# EAGLE board PCB_BOARD (EAGLE 9.7.0)
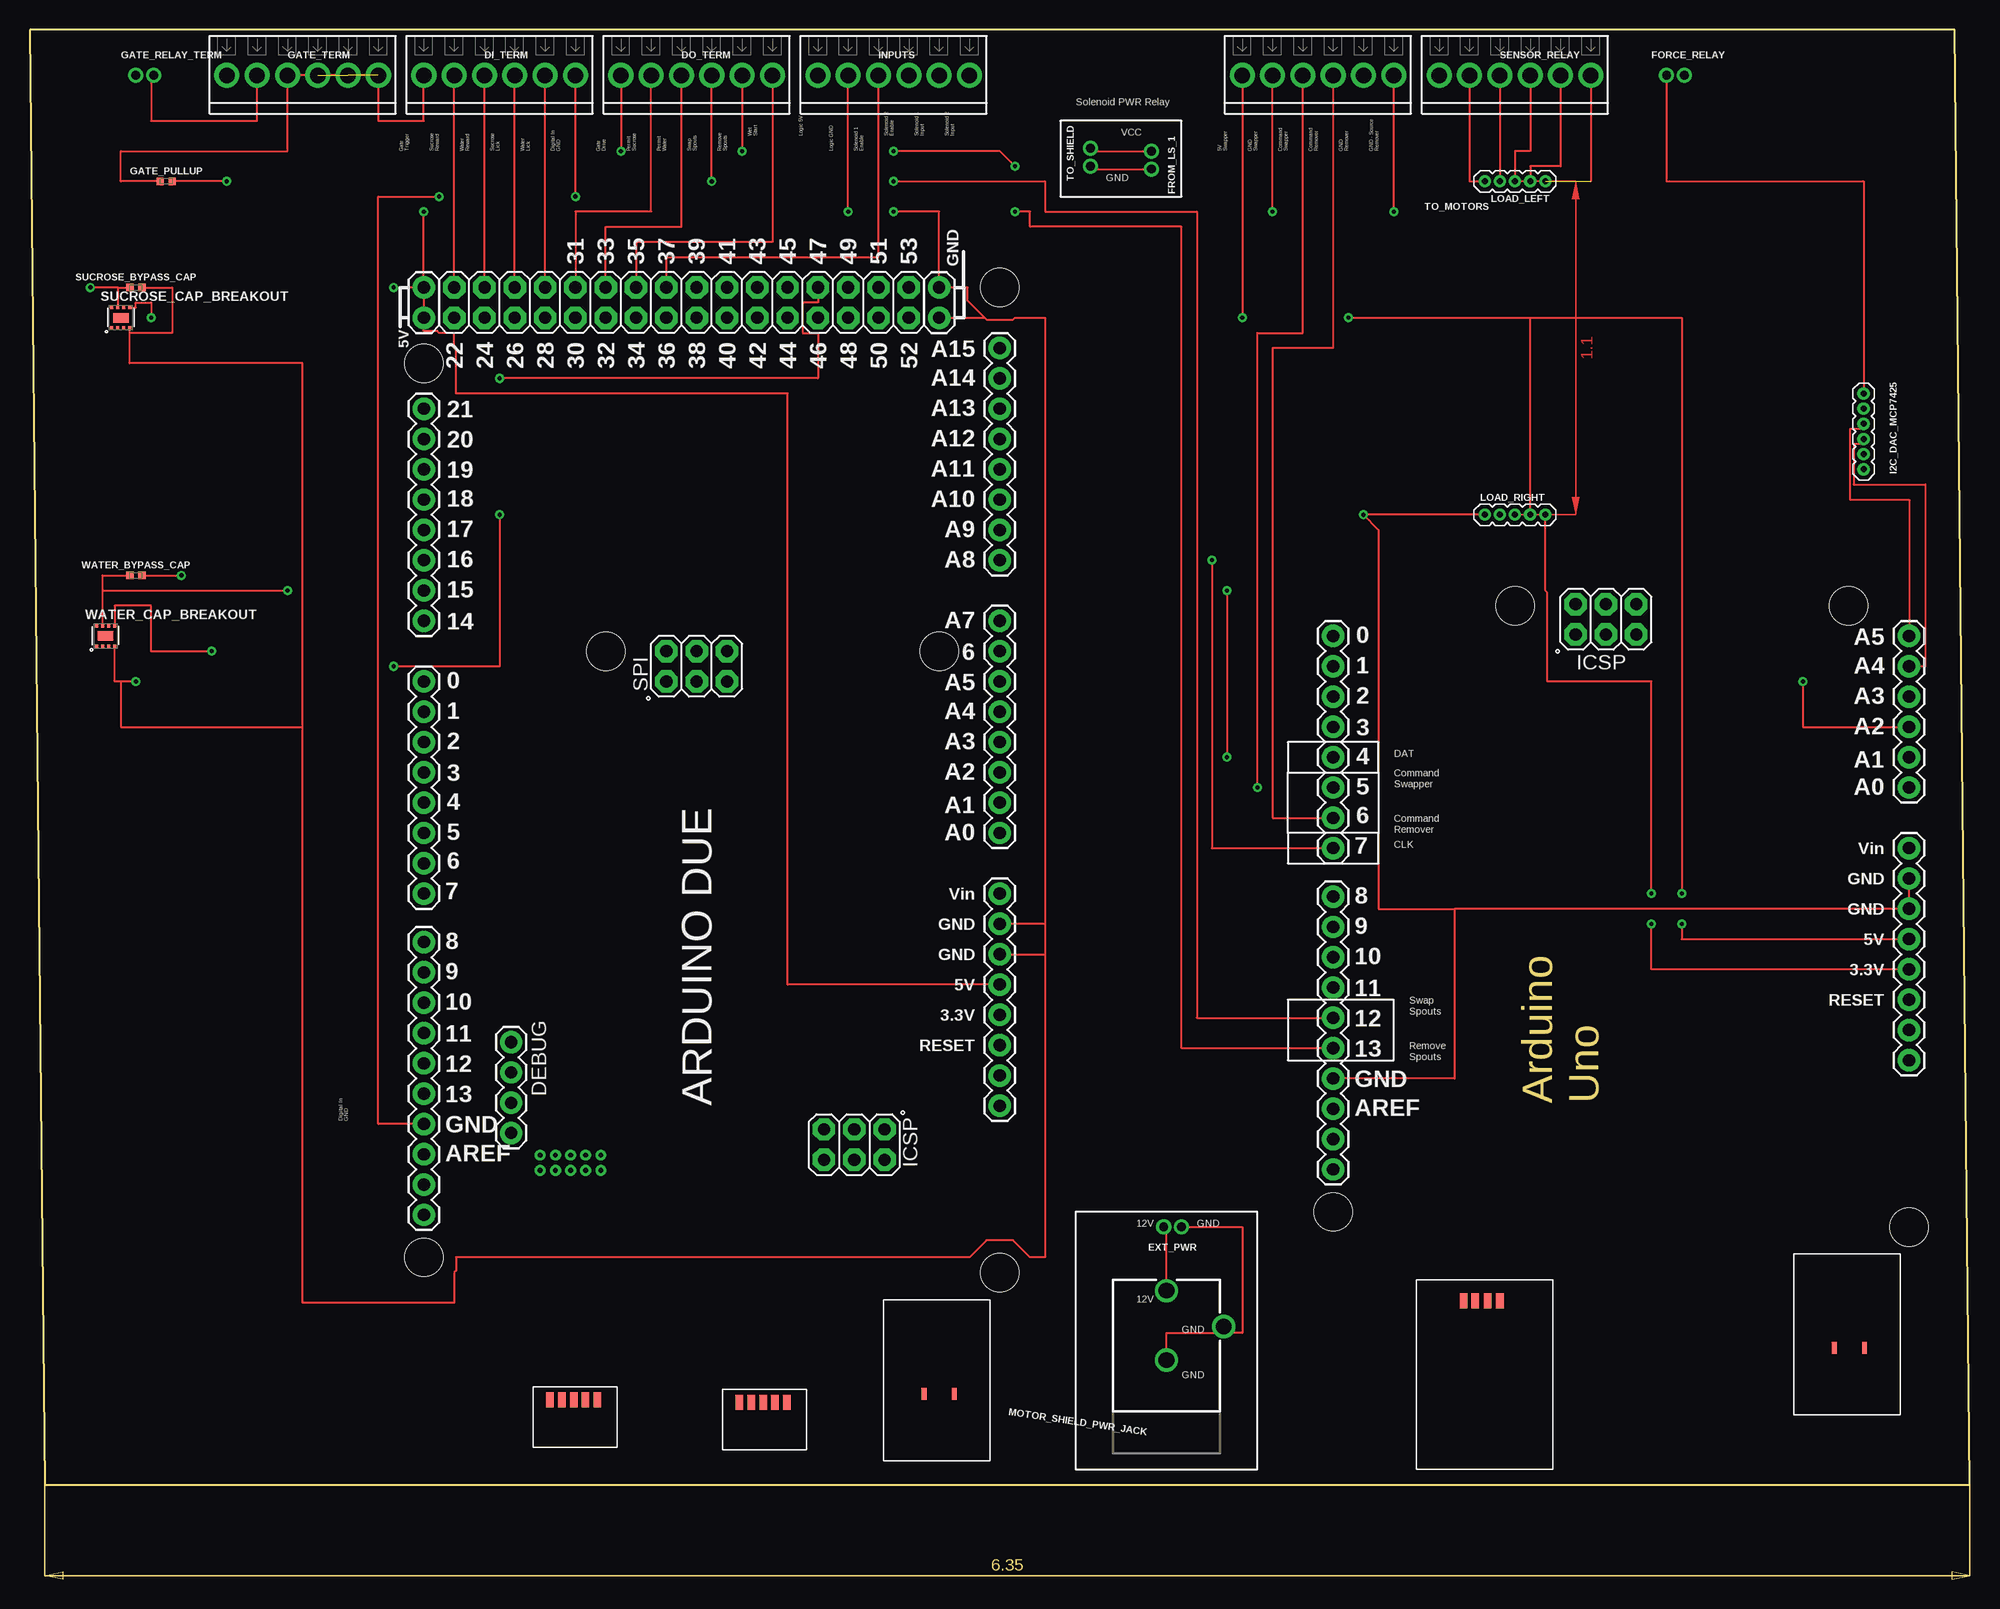
[diagram p0: board, top side]
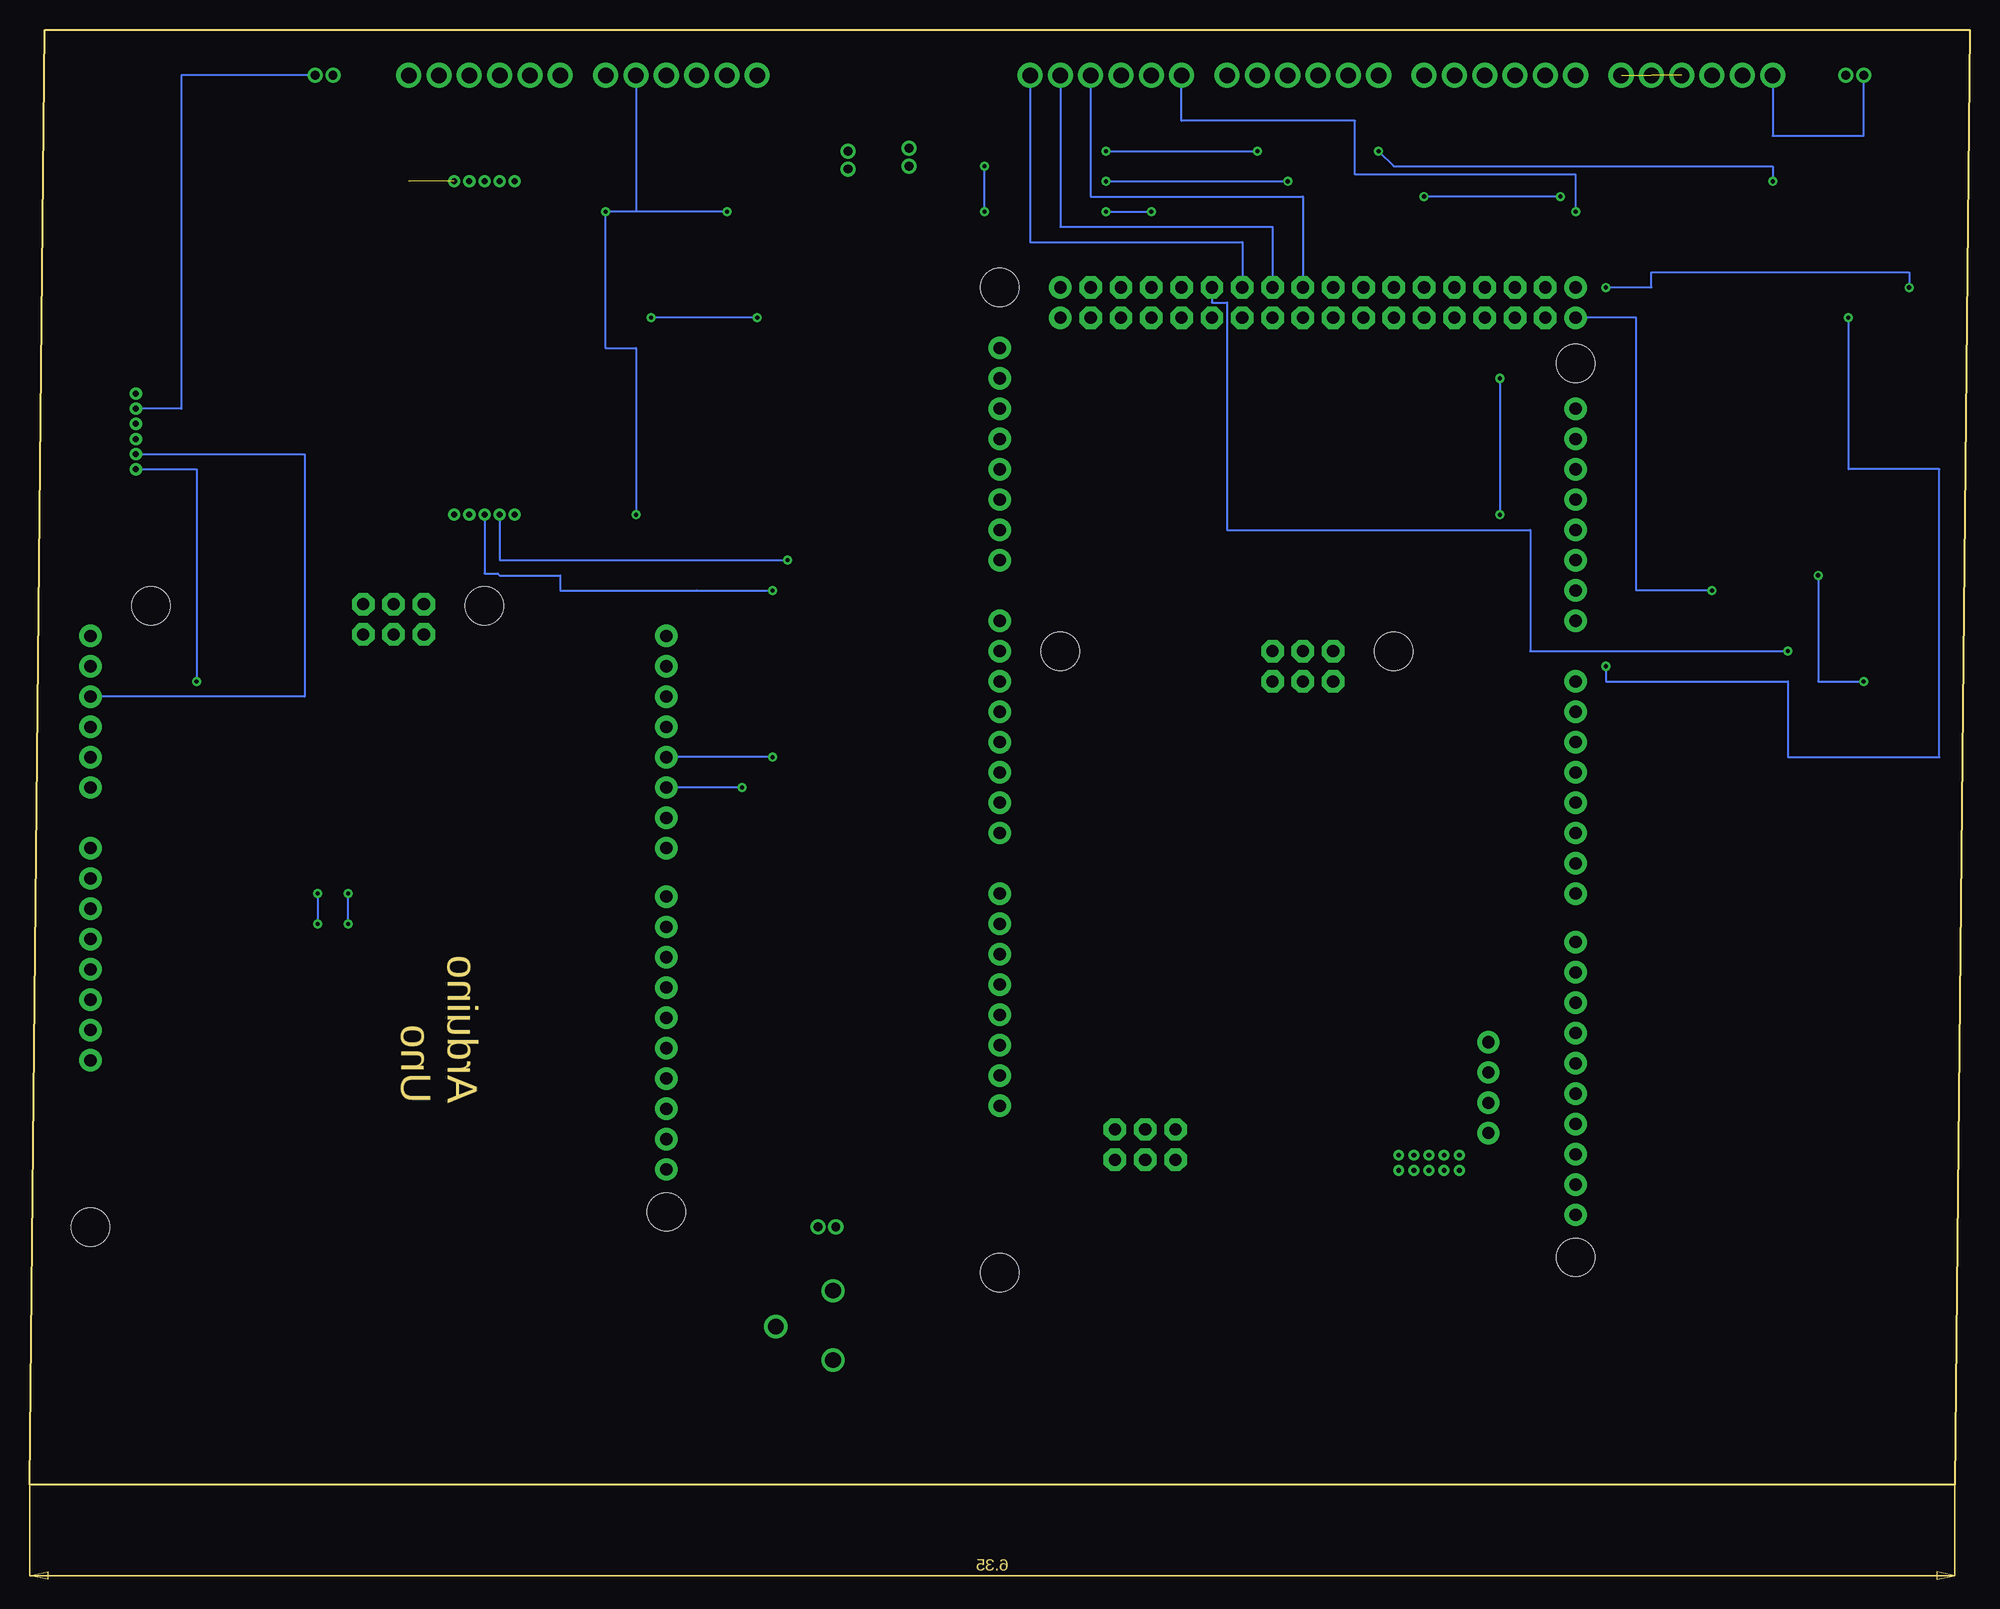
[diagram p1: board, bottom side, seen from below]

Size 162.56 x 121.92 mm. Coordinates in mm from the lower left corner, seen from the top.
Outline: 161.29,121.92 0,121.92 1.27,0 162.56,0 161.29,121.92
Copper layers (1*16): Top / Bottom
Stack-up Default Layer Stack: Top User Defined 0.035mm / Dielectric-1 User Defined 1.5mm / Bottom User Defined 0.035mm
Design rules "default": minimum track width 6mil, minimum drill 0.35mm, track to track 6mil, track to pad 6mil, pad to pad 6mil, via to via 6mil, smd to smd 6mil, copper to edge 40mil, drill to drill 6mil, minimum pad ring 10mil, minimum via ring 8mil, stop-mask expansion 4mil, vias tented up to drill 0mil, thermal gap 10mil

## Footprints (pad centres in the part's own frame; a part is rotated, then mirrored left to right if it is on the bottom)
1X06_2.54MM_SCREWPIN = drill 1.3 pad 2.1: 1 -6.35,0; 2 -3.81,0; 3 -1.27,0; 4 1.27,0; 5 3.81,0; 6 6.35,0
1X02_1.5MM_NO_SILK = drill 0.75 pad 1.25: 1 1.5,0; 2 0,0
0402-TIGHT = smd 0.6 x 0.6: 1 -0.5,0; 2 0.5,0
1X06_1.27MM = drill 0.508 pad 1: 1 0,0; 2 1.27,0; 3 2.54,0; 4 3.81,0; 5 5.08,0; 6 6.35,0
1X05_1.27MM = drill 0.508 pad 1: 1 0,0; 2 1.27,0; 3 2.54,0; 4 3.81,0; 5 5.08,0
POWER_JACK_PTH_BREAD = drill 1.3: GND 0,7.9; GNDBREAK 4.8,10.7; PWR 0,13.7
ARDUINO_UNO = drill 1.016 pad 1.88: 0 63.5,50.8; 1 60.96,50.8; 2 58.42,50.8; 3 55.88,50.8; 3.3V 35.56,2.54; 4 53.34,50.8; 5 50.8,50.8; 5V 38.1,2.54; 6 48.26,50.8; 7 45.72,50.8; 8 41.656,50.8; 9 39.116,50.8; 10 36.576,50.8; 11 34.036,50.8; 12 31.496,50.8; 13 28.956,50.8; A0 50.8,2.54; A1 53.34,2.54; A2 55.88,2.54; A3 58.42,2.54; A4 60.96,2.54; A5 63.5,2.54; AREF 23.876,50.8; GND 26.416,50.8; GND. 43.18,2.54; GND.. 40.64,2.54; I/OREF 30.48,2.54; N/C 27.94,2.54; RESET 33.02,2.54; SCL 18.796,50.8; SDA 21.336,50.8; VIN 45.72,2.54 | drill 1.016 pad 1.88 octagon: +5V 66.167,30.48; GND_ 66.167,25.4; MISO 63.627,30.48; MOSI 66.167,27.94; RESET. 63.627,25.4; SCK 63.627,27.94 | smd 1.016 x 0.508: <PWR>+V 3.861,8.814; <PWR>-V 3.861,6.274 | smd 1.27 x 0.635: <USB>+V 7.772,39.878; <USB>D+ 7.772,38.887; <USB>D- 7.772,37.871; <USB>GND 7.772,36.83 | hole 3.2: 66.04,7.62; 66.04,35.56; 15.24,50.8; 13.97,2.54
ARDUINO_DUE = drill 1.016 pad 1.88: 0 63.5,50.8; 1 60.96,50.8; 2 58.42,50.8; 3 55.88,50.8; 3.3V 35.56,2.54; 4 53.34,50.8; 5 50.8,50.8; 5V 38.1,2.54; 5V. 93.98,50.8; 5V.. 96.52,50.8; 6 48.26,50.8; 7 45.72,50.8; 8 41.656,50.8; 9 39.116,50.8; 10 36.576,50.8; 11 34.036,50.8; 12 31.496,50.8; 13 28.956,50.8; 14 68.58,50.8; 15 71.12,50.8; 16 73.66,50.8; 17 76.2,50.8; 18 78.74,50.8; 19 81.28,50.8; 20 83.82,50.8; 21 86.36,50.8; A0 50.8,2.54; A1 53.34,2.54; A2 55.88,2.54; A3 58.42,2.54; A4 60.96,2.54; A5 63.5,2.54; A6 66.04,2.54; A7 68.58,2.54; A8 73.66,2.54; A9 76.2,2.54; A10 78.74,2.54; A11 81.28,2.54; A12 83.82,2.54; A13 86.36,2.54; A14 88.9,2.54; A15 91.44,2.54; AREF 23.876,50.8; GND 26.416,50.8; GND1 33.274,43.485; GND. 43.18,2.54; GND.. 40.64,2.54; GND... 93.98,7.62; GND.... 96.52,7.62; I/OREF 30.48,2.54; N/C 27.94,2.54; RESET 33.02,2.54; RESET.. 25.654,43.485; SCL1 18.796,50.8; SDA1 21.336,50.8; SWCLK 30.734,43.485; SWDIO 28.194,43.485; VIN 45.72,2.54 | drill 1.016 pad 1.88 octagon: 22 93.98,48.26; 23 96.52,48.26; 24 93.98,45.72; 25 96.52,45.72; 26 93.98,43.18; 27 96.52,43.18; 28 93.98,40.64; 29 96.52,40.64; 30 93.98,38.1; 31 96.52,38.1; 32 93.98,35.56; 33 96.52,35.56; 34 93.98,33.02; 35 96.52,33.02; 36 93.98,30.48; 37 96.52,30.48; 38 93.98,27.94; 39 96.52,27.94; 40 93.98,25.4; 41 96.52,25.4; 42 93.98,22.86; 43 96.52,22.86; 44 93.98,20.32; 45 96.52,20.32; 46 93.98,17.78; 47 96.52,17.78; 48 93.98,15.24; 49 96.52,15.24; 50 93.98,12.7; 51 96.52,12.7; 52 93.98,10.16; 53 96.52,10.16; +5V 25.959,17.272; +5V_ 66.04,30.48; GND_ 25.959,12.192; GND__ 66.04,25.4; MISO 63.5,30.48; MISO2 23.419,17.272; MOSI 66.04,27.94; MOSI2 25.959,14.732; RESET2 23.419,12.192; RESET. 63.5,25.4; SCK 63.5,27.94; SCK2 23.419,14.732 | drill 0.406 pad 0.61: +3.3V 23.8,35.966; GND1. 23.8,37.236; GND1.. 23.8,38.506; GND1... 23.8,41.046; N/C. 23.8,39.776; RESET_ 22.53,41.046; TCK 22.53,37.236; TDI 22.53,39.776; TDO 22.53,38.506; TMS 22.53,35.966 | smd 1.016 x 0.508: <PWR>+V 3.81,8.89; <PWR>-V 3.81,6.35 | smd 1.27 x 0.635: <USB1>+V 3.099,24.359; <USB1>D+ 3.099,23.368; <USB1>D- 3.099,22.352; <USB1>GND 3.099,20.371; <USB1>ID 3.099,21.387; <USB2>+V1 3.302,40.234; <USB2>D+1 3.302,39.243; <USB2>D-1 3.302,38.227; <USB2>GND1 3.302,36.246; <USB2>ID 3.302,37.262 | hole 3.2: 15.24,50.8; 13.97,2.54; 66.04,35.56; 66.04,7.62; 90.17,50.8; 96.52,2.54
UDFN/USON_8_PAD = smd 0.25 x 0.3: 1 -0.75,-0.852; 2 -0.25,-0.852; 3 0.25,-0.852; 4 0.75,-0.852; 5 0.75,0.852; 6 0.25,0.852; 7 -0.25,0.852; 8 -0.75,0.852 | smd 1.3 x 0.8: P$1 0,0

## Placement (x,y rotation side)
DI_TERM  0  [1X06_2.54MM_SCREWPIN]  39.37,118.11 0 top
DO_TERM  1  [1X06_2.54MM_SCREWPIN]  55.88,118.11 0 top
EXT_PWR  2  [1X02_1.5MM_NO_SILK]  96.52,21.59 180 top
FORCE_RELAY  3  [1X02_1.5MM_NO_SILK]  137.16,118.11 0 top
FROM_LS_1  [1X02_1.5MM_NO_SILK]  93.98,111.76 270 top
GATE_PULLUP  3.3KOHM-0402T-1/16W-1%  [0402-TIGHT]  11.43,109.22 0 top
GATE_RELAY_TERM  4  [1X02_1.5MM_NO_SILK]  8.89,118.11 0 top
GATE_TERM  5  [1X06_2.54MM_SCREWPIN]  22.86,118.11 0 top
I2C_DAC_MCP7425  5  [1X06_1.27MM]  153.67,85.09 90 top
INPUTS  6  [1X06_2.54MM_SCREWPIN]  72.39,118.11 0 top
LOAD_LEFT  7  [1X05_1.27MM]  127,109.22 180 top
LOAD_RIGHT  8  [1X05_1.27MM]  121.92,81.28 0 top
MOTOR_SHIELD_PWR_JACK  POWER_JACKPTH_BREAD  [POWER_JACK_PTH_BREAD]  95.25,2.54 0 top
MOTORS_UNO  ARDUINO_UNO  [ARDUINO_UNO]  160.02,7.62 90 top
REWARDS_DUE  ARDUINO_DUE  [ARDUINO_DUE]  83.82,3.81 90 top
SENSOR_RELAY  9  [1X06_2.54MM_SCREWPIN]  124.46,118.11 0 top
SUCROSE_BYPASS_CAP  0.1uF  [0402-TIGHT]  8.89,100.33 0 top
SUCROSE_CAP_BREAKOUT  AT42QT1011-MAHR  [UDFN/USON_8_PAD]  7.62,97.79 0 top
TO_MOTORS  10  [1X06_2.54MM_SCREWPIN]  107.95,118.11 0 top
TO_SHIELD  [1X02_1.5MM_NO_SILK]  88.9,110.49 90 top
WATER_BYPASS_CAP  0.1uF  [0402-TIGHT]  8.89,76.2 0 top
WATER_CAP_BREAKOUT  AT42QT1011-MAHR  [UDFN/USON_8_PAD]  6.35,71.12 0 top

## Library data of the parts
DI_TERM DO_TERM GATE_TERM INPUTS SENSOR_RELAY TO_MOTORS = SparkFun-Connectors; PROD_ID: CONN-14885
EXT_PWR FORCE_RELAY FROM_LS_1 GATE_RELAY_TERM I2C_DAC_MCP7425 LOAD_LEFT LOAD_RIGHT TO_SHIELD = SparkFun-Connectors
GATE_PULLUP = SparkFun-Resistors; PROD_ID: RES-15923
MOTOR_SHIELD_PWR_JACK = SparkFun-Connectors; PROD_ID: COMP-13253
MOTORS_UNO = UNO_NO_DIM
REWARDS_DUE = DUE_NO_DIM
SUCROSE_BYPASS_CAP WATER_BYPASS_CAP = SparkFun-RF; PROD_ID: CAP-15083
SUCROSE_CAP_BREAKOUT WATER_CAP_BREAKOUT = SparkFun-Sensors; PROD_ID: IC-13838

## Nets
3.3V_UNO_RAIL: LOAD_RIGHT.5 MOTORS_UNO.3.3V
5V_DUE_RAIL: INPUTS.1 REWARDS_DUE.5V REWARDS_DUE.5V. REWARDS_DUE.5V.. SUCROSE_BYPASS_CAP.1 SUCROSE_CAP_BREAKOUT.7 WATER_BYPASS_CAP.1 WATER_CAP_BREAKOUT.7
5V_UNO_RAIL: LOAD_RIGHT.4 MOTORS_UNO.5V TO_MOTORS.1
BLK: LOAD_LEFT.2 SENSOR_RELAY.5
CLK: LOAD_RIGHT.2 MOTORS_UNO.7
COM_REMOVE_SPOUT: MOTORS_UNO.6 TO_MOTORS.4
COM_SWAP_SPOUT: MOTORS_UNO.5 TO_MOTORS.3
DAC_FORCE_OUT: FORCE_RELAY.2 I2C_DAC_MCP7425.6
DAC_GND: I2C_DAC_MCP7425.1 MOTORS_UNO.A2
DAC_GND_OUT: FORCE_RELAY.1 I2C_DAC_MCP7425.5
DAC_VCC: I2C_DAC_MCP7425.2 MOTORS_UNO.A3
DAQ-5V-SENSOR: GATE_RELAY_TERM.2 GATE_TERM.1
DAQ-GND-SENSOR: GATE_RELAY_TERM.1 GATE_TERM.2
DAT: LOAD_RIGHT.3 MOTORS_UNO.4
DIGIT_IN_GND: DI_TERM.6 REWARDS_DUE.GND
GATE_DRIVE: DO_TERM.1 GATE_PULLUP.2
GATE_TRIGGER: DI_TERM.1 GATE_PULLUP.1 GATE_TERM.3 GATE_TERM.4 GATE_TERM.5 GATE_TERM.6
GND_DUE_RAIL: INPUTS.2 REWARDS_DUE.GND. REWARDS_DUE.GND.. REWARDS_DUE.GND... REWARDS_DUE.GND.... SUCROSE_BYPASS_CAP.2 SUCROSE_CAP_BREAKOUT.4 WATER_BYPASS_CAP.2 WATER_CAP_BREAKOUT.4
GND_UNO_RAIL: LOAD_RIGHT.1 MOTORS_UNO.GND MOTORS_UNO.GND. MOTORS_UNO.GND.. TO_MOTORS.2 TO_MOTORS.5 TO_MOTORS.6
GRN: LOAD_LEFT.4 SENSOR_RELAY.3
LS_GND_1: FROM_LS_1.2 TO_SHIELD.1
LS_PWR_1: FROM_LS_1.1 TO_SHIELD.2
MS_GND: EXT_PWR.2 MOTOR_SHIELD_PWR_JACK.GND MOTOR_SHIELD_PWR_JACK.GNDBREAK
MS_PWR: EXT_PWR.1 MOTOR_SHIELD_PWR_JACK.PWR
N$3: MOTORS_UNO.A3
PERMIT_SUCROSE: DO_TERM.2 REWARDS_DUE.31
PERMIT_WATER: DO_TERM.3 REWARDS_DUE.33
RED: LOAD_LEFT.1 SENSOR_RELAY.6
REMOVE_SPOUTS: DO_TERM.5 MOTORS_UNO.13
SCL: I2C_DAC_MCP7425.4 MOTORS_UNO.A5
SDA: I2C_DAC_MCP7425.3 MOTORS_UNO.A4
SOLE_1_EN: INPUTS.3 REWARDS_DUE.37
SOLE_1_IN: INPUTS.5 REWARDS_DUE.41
SOLE_2_EN: INPUTS.4 REWARDS_DUE.39
SOLE_2_IN: INPUTS.6 REWARDS_DUE.43
SUCROSE_CAP_SIGNAL: REWARDS_DUE.47 SUCROSE_CAP_BREAKOUT.5
SUCROSE_LICK: DI_TERM.4 REWARDS_DUE.27
SUCROSE_REWARD: DI_TERM.2 REWARDS_DUE.23
SWAP_SPOUTS: DO_TERM.4 MOTORS_UNO.12
WATER_CAP_SIGNAL: REWARDS_DUE.45 WATER_CAP_BREAKOUT.5
WATER_LICK: DI_TERM.5 REWARDS_DUE.29
WATER_REWARD: DI_TERM.3 REWARDS_DUE.25
WET_START: DO_TERM.6 REWARDS_DUE.35
WHT: LOAD_LEFT.3 SENSOR_RELAY.4
YLW: LOAD_LEFT.5 SENSOR_RELAY.2

## Tracks (layer width: path | path; a pad name or v marks a point on that pad's centre or on a via)
3.3V_UNO_RAIL  (via drill 0.35)
  Top 0.152: MOTORS_UNO.3.3V 135.89,43.18 v135.89,46.99 | v135.89,49.53 135.89,67.31 127.15,67.31 127.15,74.78 127,74.93 LOAD_RIGHT.5
  Bottom 0.152: v135.89,46.99 v135.89,49.53
5V_DUE_RAIL  (via drill 0.35)
  Top 0.152: REWARDS_DUE.5V.. REWARDS_DUE.5V. 33.02,96.67 34.14,96.67 34.29,96.52 35.56,96.52 35.56,95.25 35.71,95.09 35.71,91.44 63.5,91.44 63.5,41.91 REWARDS_DUE.5V | REWARDS_DUE.5V.. v33.02,106.68 | 7.37,100.33 SUCROSE_CAP_BREAKOUT.7 | 7.37,100.33 SUCROSE_BYPASS_CAP.1 | REWARDS_DUE.5V.. v30.48,100.33 | 7.37,100.33 v5.08,100.33 | WATER_CAP_BREAKOUT.7 6.1,74.93 | 6.1,74.93 6.1,76.2 WATER_BYPASS_CAP.1 | 6.1,74.93 v21.59,74.93
  Bottom 0.152: INPUTS.1 66.04,114.3 51.51,114.3 51.51,109.78 33.02,109.78 v33.02,106.68 | v30.48,100.33 26.67,100.33 26.67,101.6 5.08,101.6 v5.08,100.33 | v21.59,74.93 27.94,74.93 27.94,97.79 REWARDS_DUE.5V.
5V_UNO_RAIL  (via drill 0.35)
  Top 0.152: TO_MOTORS.1 v101.6,97.79 | v110.49,97.79 125.73,97.79 | 125.73,97.79 138.43,97.79 v138.43,49.53 | v138.43,46.99 138.43,45.72 MOTORS_UNO.5V | LOAD_RIGHT.4 125.73,97.79
  Bottom 0.152: v101.6,97.79 v110.49,97.79 | v138.43,49.53 v138.43,46.99
BLK
  Top 0.152: SENSOR_RELAY.5 128.27,110.49 125.73,110.49 LOAD_LEFT.2
CLK  (via drill 0.35)
  Top 0.152: v99.06,77.47 99.06,53.34 MOTORS_UNO.7
  Bottom 0.152: LOAD_RIGHT.2 123.19,77.47 106.68,77.47 v99.06,77.47
COM_REMOVE_SPOUT
  Top 0.152: MOTORS_UNO.6 104.14,55.88 104.14,95.25 109.22,95.25 TO_MOTORS.4
COM_SWAP_SPOUT  (via drill 0.35)
  Top 0.152: TO_MOTORS.3 106.68,96.52 102.87,96.52 v102.87,58.42
  Bottom 0.152: v102.87,58.42 MOTORS_UNO.5
DAC_FORCE_OUT
  Top 0.152: FORCE_RELAY.2 137.16,109.22 153.67,109.22 I2C_DAC_MCP7425.6
DAC_GND  (via drill 0.35)
  Top 0.152: v148.59,67.31 148.59,63.5 MOTORS_UNO.A2
  Bottom 0.152: I2C_DAC_MCP7425.1 148.59,85.09 v148.59,67.31
DAC_GND_OUT
  Bottom 0.152: FORCE_RELAY.1 149.86,118.11 149.86,90.17 I2C_DAC_MCP7425.5
DAC_VCC
  Bottom 0.152: I2C_DAC_MCP7425.2 139.55,86.36 139.55,66.04 MOTORS_UNO.A3
DAQ-5V-SENSOR
  Bottom 0.152: GATE_TERM.1 16.51,113.03 8.89,113.03 GATE_RELAY_TERM.2
DAQ-GND-SENSOR
  Top 0.152: GATE_TERM.2 19.05,114.3 10.16,114.3 10.16,118.11 GATE_RELAY_TERM.1
DAT  (via drill 0.35)
  Top 0.152: v100.33,74.93 v100.33,60.96
  Bottom 0.152: v100.33,74.93 106.68,74.93 118.11,74.93 118.11,76.2 123.19,76.2 123.34,76.35 124.46,76.35 LOAD_RIGHT.3 | v100.33,60.96 MOTORS_UNO.4
DIGIT_IN_GND  (via drill 0.35)
  Top 0.152: REWARDS_DUE.GND 29.21,30.23 29.21,107.95 v34.29,107.95 | v45.72,107.95 DI_TERM.6
  Bottom 0.152: v34.29,107.95 v45.72,107.95
GATE_DRIVE  (via drill 0.35)
  Top 0.152: DO_TERM.1 v49.53,111.76 | v16.51,109.22 GATE_PULLUP.2
  Bottom 0.152: v49.53,111.76 48.26,110.49 16.51,110.49 v16.51,109.22
GATE_TRIGGER  (2 unrouted)
  Top 0.152: GATE_PULLUP.1 7.62,109.22 7.62,111.76 21.59,111.76 GATE_TERM.3 GATE_TERM.6 29.21,114.3 33.02,114.3 DI_TERM.1
GND_DUE_RAIL  (via drill 0.35)
  Top 0.152: 85.09,46.99 REWARDS_DUE.GND. | REWARDS_DUE.GND.. 85.09,44.45 | 85.09,46.99 85.09,44.45 | 80.01,97.79 78.59,99.22 78.59,100.33 REWARDS_DUE.GND.... 76.2,106.68 v72.39,106.68 | 85.09,46.99 85.09,97.79 82.55,97.79 82.39,97.64 80.17,97.64 80.01,97.79 | REWARDS_DUE.GND... 80.01,97.79 | v68.58,106.68 INPUTS.2 | SUCROSE_BYPASS_CAP.2 11.93,100.33 11.93,96.52 8.37,96.52 SUCROSE_CAP_BREAKOUT.4 8.37,93.98 22.86,93.98 22.86,63.5 | 85.09,44.45 85.09,19.05 83.82,19.05 82.39,20.47 80.17,20.47 78.74,19.05 35.71,19.05 35.71,17.94 35.56,17.78 35.56,15.24 22.86,15.24 22.86,63.5 | WATER_BYPASS_CAP.2 v12.7,76.2 | v8.89,67.31 7.62,67.31 | 7.62,67.31 7.1,67.31 WATER_CAP_BREAKOUT.4 | 7.62,67.31 7.62,63.5 22.86,63.5
  Bottom 0.152: v72.39,106.68 v68.58,106.68 | v12.7,76.2 12.7,67.31 v8.89,67.31
GND_UNO_RAIL  (via drill 0.35)
  Top 0.152: 119.38,48.26 119.38,34.04 MOTORS_UNO.GND | v104.14,106.68 TO_MOTORS.2 | v114.3,106.68 TO_MOTORS.6 | MOTORS_UNO.GND. MOTORS_UNO.GND.. 119.38,48.26 | 119.38,48.26 113.03,48.26 113.03,80.01 v111.76,81.28 LOAD_RIGHT.1
  Bottom 0.152: v104.14,106.68 111.76,106.68 | 111.76,106.68 v114.3,106.68 114.3,95.25 111.76,95.25 v111.76,81.28 | TO_MOTORS.5 111.76,106.68
GRN
  Top 0.152: SENSOR_RELAY.3 LOAD_LEFT.4
LS_GND_1
  Top 0.152: FROM_LS_1.2 88.9,111.76 TO_SHIELD.1
LS_PWR_1
  Top 0.152: FROM_LS_1.1 88.9,110.26 TO_SHIELD.2
MS_GND
  Top 0.152: EXT_PWR.2 101.6,21.59 101.6,12.7 100.05,12.7 | 100.05,12.7 MOTOR_SHIELD_PWR_JACK.GNDBREAK | MOTOR_SHIELD_PWR_JACK.GND 95.25,12.7 100.05,12.7
MS_PWR
  Top 0.152: MOTOR_SHIELD_PWR_JACK.PWR 95.25,21.59 EXT_PWR.1
PERMIT_SUCROSE
  Top 0.152: DO_TERM.2 52.07,106.68 45.72,106.68 REWARDS_DUE.31
PERMIT_WATER
  Top 0.152: DO_TERM.3 54.61,105.41 48.26,105.41 REWARDS_DUE.33
RED  (1 unrouted)
  Top 0.152: SENSOR_RELAY.6 130.81,109.22
REMOVE_SPOUTS  (via drill 0.35)
  Top 0.152: MOTORS_UNO.13 96.52,36.58 96.52,105.41 83.82,105.41 83.82,106.68 v82.55,106.68 | v82.55,110.49 81.28,111.76 v72.39,111.76 | DO_TERM.5 v59.69,111.76
  Bottom 0.152: v82.55,106.68 v82.55,110.49 | v72.39,111.76 v59.69,111.76
SCL
  Top 0.152: I2C_DAC_MCP7425.4 153.67,88.47 152.53,88.47 152.53,82.55 157.48,82.55 MOTORS_UNO.A5
SDA
  Top 0.152: I2C_DAC_MCP7425.3 153.67,87.2 152.83,87.2 152.83,83.82 158.85,83.82 158.85,68.58 MOTORS_UNO.A4
SOLE_1_EN
  Top 0.152: INPUTS.3 71.12,102.87 53.34,102.87 REWARDS_DUE.37
SOLE_1_IN
  Bottom 0.152: INPUTS.5 76.2,105.41 58.42,105.41 REWARDS_DUE.41
SOLE_2_EN
  Bottom 0.152: REWARDS_DUE.39 55.88,107.95 73.66,107.95 INPUTS.4
SOLE_2_IN
  Bottom 0.152: INPUTS.6 78.74,104.14 60.96,104.14 REWARDS_DUE.43
SUCROSE_CAP_SIGNAL  (via drill 0.35)
  Top 0.152: SUCROSE_CAP_BREAKOUT.5 8.89,98.64 8.89,99.06 10.16,99.06 v10.16,97.79 | REWARDS_DUE.47 66.04,99.06 64.77,99.06 64.77,96.52 66.04,96.52 66.04,92.71 v39.37,92.71 | v39.37,81.28 39.37,68.58 v30.48,68.58
  Bottom 0.152: v39.37,92.71 v39.37,81.28 | v30.48,68.58 30.48,67.31 15.24,67.31 15.24,60.96 2.54,60.96 2.54,85.09 10.16,85.09 v10.16,97.79
SUCROSE_LICK
  Top 0.152: REWARDS_DUE.27 DI_TERM.4
SUCROSE_REWARD
  Top 0.152: REWARDS_DUE.23 DI_TERM.2
SWAP_SPOUTS  (via drill 0.35)
  Top 0.152: MOTORS_UNO.12 97.79,39.12 97.79,106.68 85.09,106.68 85.09,109.22 v72.39,109.22 | v57.15,109.22 DO_TERM.4
  Bottom 0.152: v72.39,109.22 v57.15,109.22
WATER_CAP_SIGNAL  (via drill 0.35)
  Top 0.152: v15.24,69.85 10.16,69.85 10.16,73.66 7.1,73.66 WATER_CAP_BREAKOUT.5
  Bottom 0.152: REWARDS_DUE.45 63.5,99.06 62.23,99.06 62.23,80.01 36.83,80.01 36.83,69.85 v15.24,69.85
WATER_LICK
  Top 0.152: REWARDS_DUE.29 DI_TERM.5
WATER_REWARD
  Top 0.152: REWARDS_DUE.25 DI_TERM.3
WET_START
  Top 0.152: DO_TERM.6 62.23,104.14 50.8,104.14 REWARDS_DUE.35
WHT
  Top 0.152: SENSOR_RELAY.4 125.73,111.76 124.46,111.76 LOAD_LEFT.3
YLW
  Top 0.152: SENSOR_RELAY.2 120.65,109.22 LOAD_LEFT.5
(copper drawn outside any net)
  shapes: Top area x1

## Text on the board
tPlace: Solenoid PWR Relay | Wet / Start | Logic 5V | Solenoid 2 / Enable | Solenoid 1 / Input | Solenoid 2 / Input | VCC | Gate / Trigger | Sucrose / Reward | Water / Reward | Sucrose / Lick | Water / Lick | Digital In / GND | Gate / Drive | Permit / Sucrose | Permit / Water | Swap / Spouts | Remove / Spouts | Logic GND | Solenoid 1 / Enable | 5V / Swapper | GND / Swapper | Command / Swapper | Command / Remover | GND / Remover | GND - Source / Remover | GND | DAT | Command / Swapper | Command / Remover | CLK | Swap / Spouts | Remove / Spouts | Digital In / GND | 12V | GND | 12V | GND | GND